# Altium PCB PCB_Tesis_v2_2024-11-08.pcbdoc
Units mil, origin at the board's own origin, x right, y up, seen from the top; angles counter-clockwise.
Board outline 5240.37 x 6489.24 mil, 2 copper layers (Top Layer, Bottom Layer); 33 components, 25 nets, 118 pads, 14 vias.
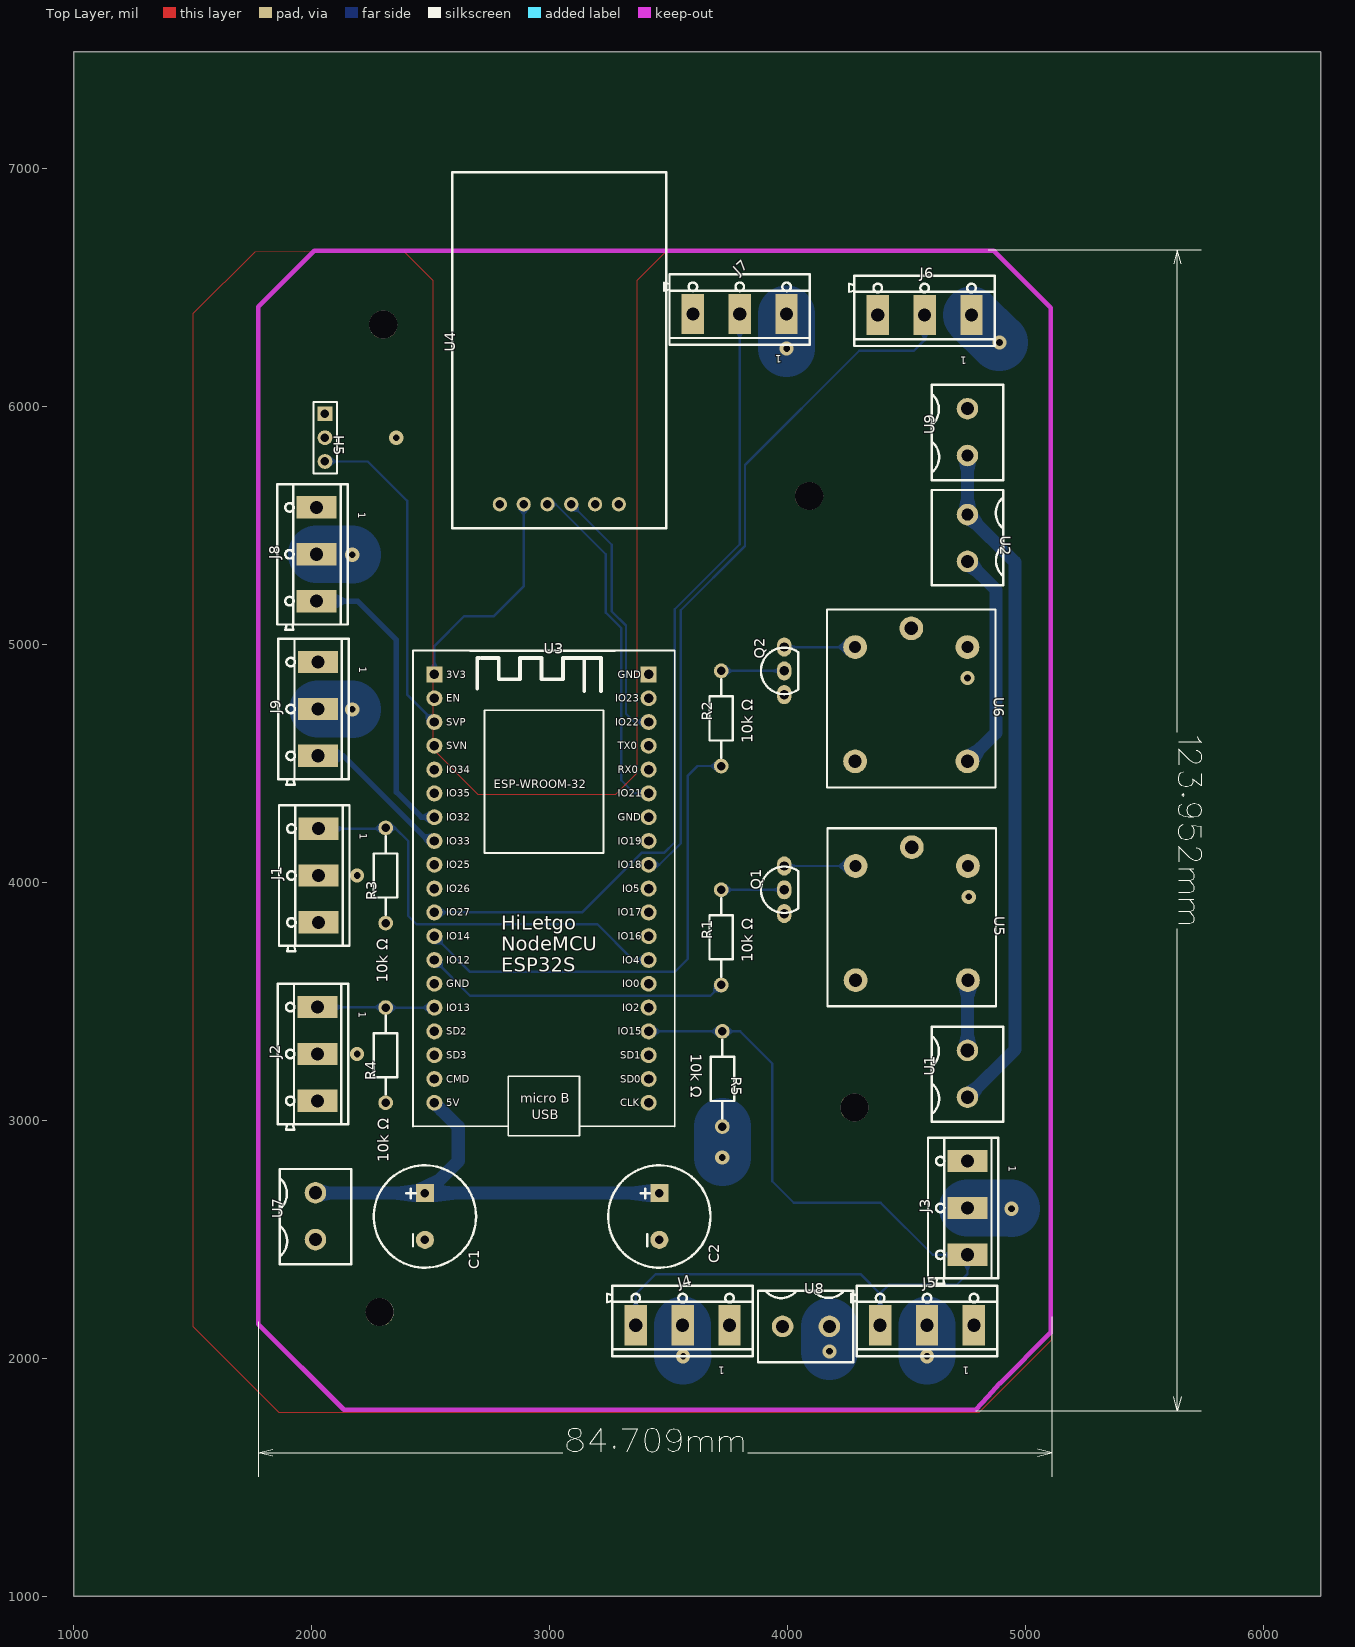
[diagram p0: Top Layer view]
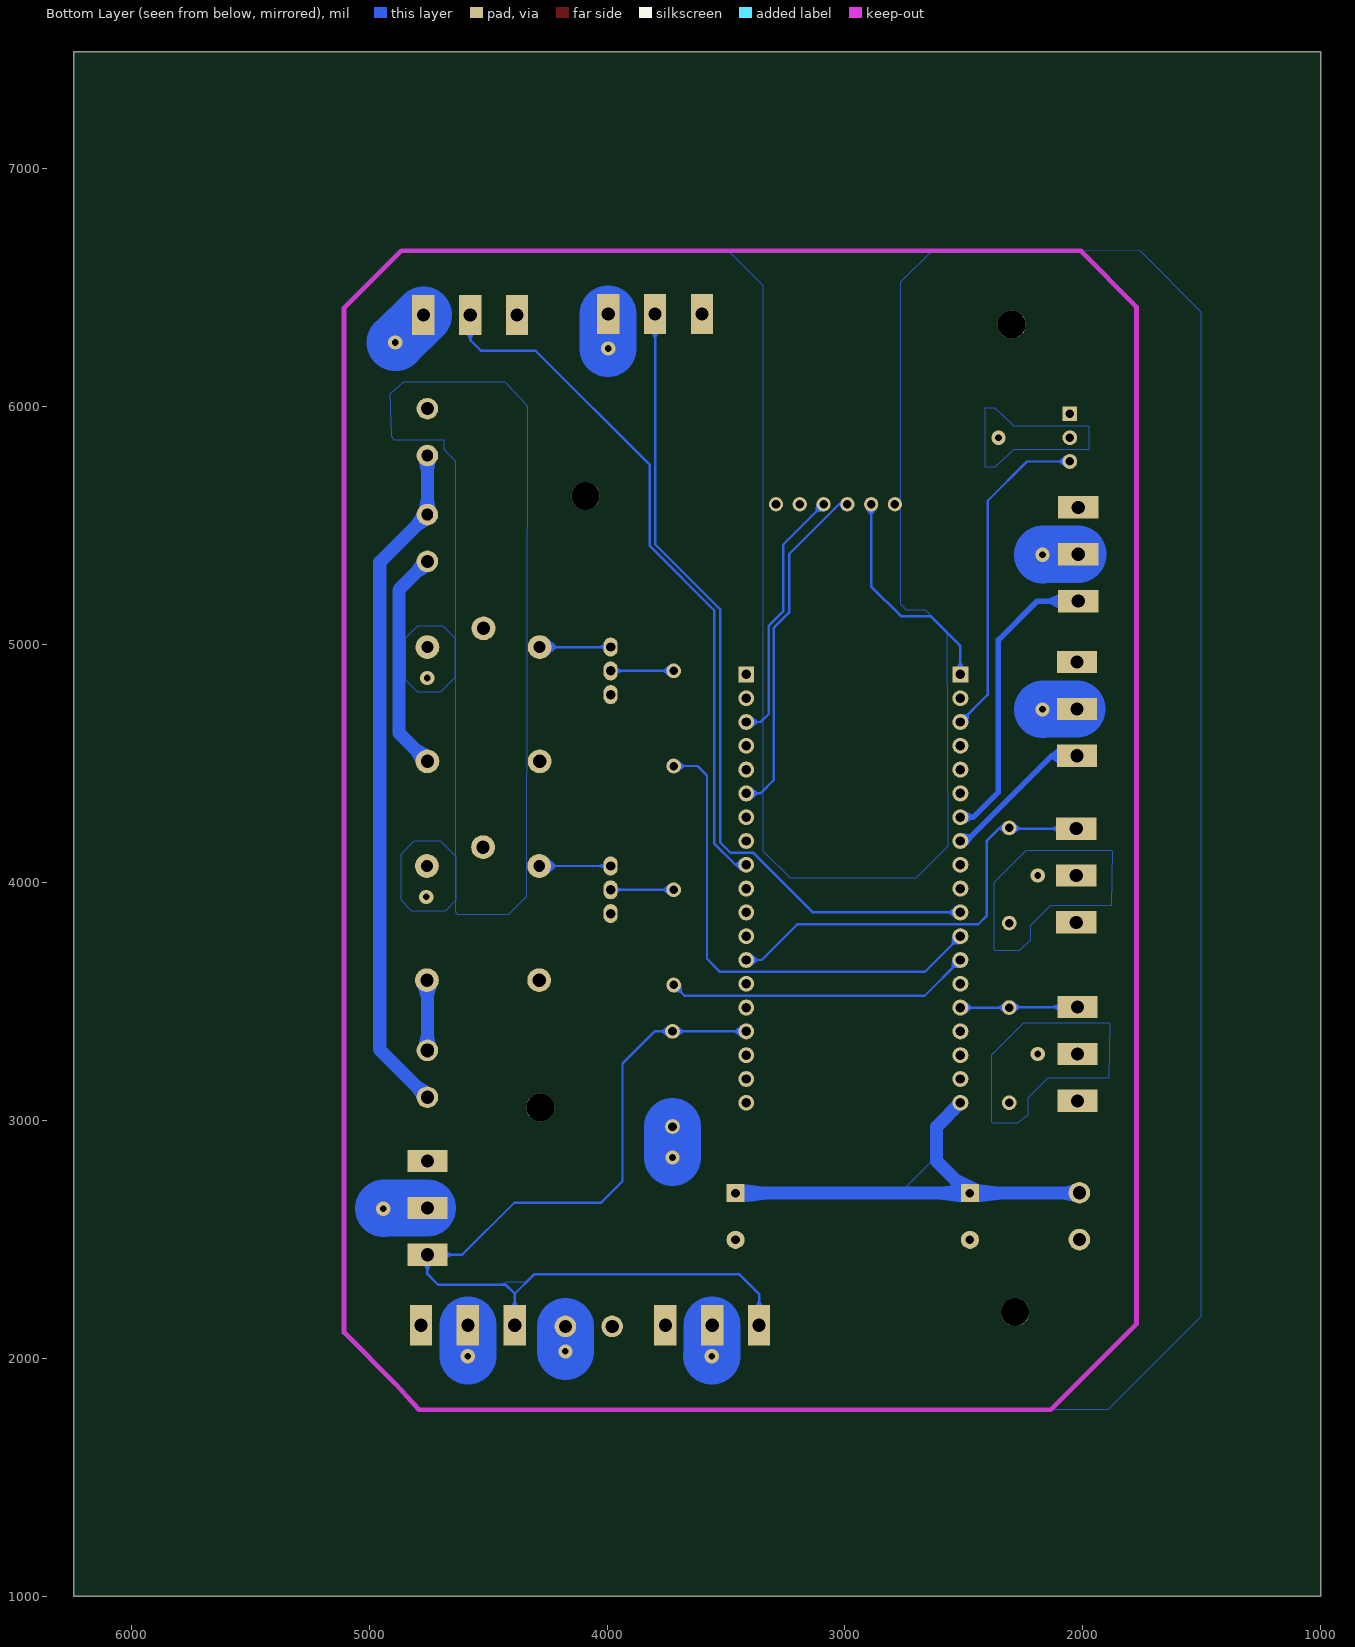
[diagram p1: Bottom Layer view, seen from below]

## Layer stack, top to bottom
Top Layer: signal copper (thickness not stored)
Dielectric: dielectric 12.6, FR-4, Dk 4.8
Bottom Layer: signal copper (thickness not stored)

## Board outline
6240.37,1000 1000,1000 1000,7489.24 6240.37,7489.24

## Components (designator, comment, footprint, x,y, rotation, side; value= is the part's Value field where it differs from the comment)
C1 "1000UF-25V(PTH)KIT" CPOL-RADIAL-1000UF-25V-KIT 2475,2595.18 r90 top
C2 "1000UF-25V(PTH)KIT" CPOL-RADIAL-1000UF-25V-KIT 3460,2595.18 r90 top
H5 "HDR-F-2.54_1x3" HDR-F-2.54_1X3 2055,5868.18 r270 top
J1 "CON_TERMINAL_BLOCK_03-5MM" TERMINAL_BLOCK_3P_5 2028,4028.19 r90 top
J2 "CON_TERMINAL_BLOCK_03-5MM" TERMINAL_BLOCK_3P_5 2023,3278.18 r90 top
J3 "CON_TERMINAL_BLOCK_03-5MM" TERMINAL_BLOCK_3P_5 4755,2631.18 r90 top
J4 "CON_TERMINAL_BLOCK_03-5MM" TERMINAL_BLOCK_3P_5 3558,2138.18 r0 top
J5 "CON_TERMINAL_BLOCK_03-5MM" TERMINAL_BLOCK_3P_5 4585,2138.18 r0 top
J6 "CON_TERMINAL_BLOCK_03-5MM" TERMINAL_BLOCK_3P_5 4575,6383.18 r0 top
J7 "CON_TERMINAL_BLOCK_03-5MM" TERMINAL_BLOCK_3P_5 3798,6388.18 r0 top
J8 "CON_TERMINAL_BLOCK_03-5MM" TERMINAL_BLOCK_3P_5 2020,5378.18 r90 top
J9 "CON_TERMINAL_BLOCK_03-5MM" TERMINAL_BLOCK_3P_5 2025,4728.18 r90 top
Q1 "2N2222A" "2N222A OH" 3985,3968.18 r90 top
Q2 "2N2222A" "2N222A OH" 3985,4888.18 r90 top
R1 "100Ω ±5%" "RESISTANCE 10K" 3720,3768.18 r90 top
R2 "100Ω ±5%" "RESISTANCE 10K" 3720,4688.18 r90 top
R3 "10KΩ ±5%" "RESISTANCE 10K" 2310,4028.18 r90 top
R4 "10KΩ ±5%" "RESISTANCE 10K" 2310,3273.18 r90 top
R5 "4.7KΩ ±5%" "RESISTANCE 10K" 3725,3173.19 r270 top
U1 "TERMINAL BLOCK 2P COPY" "BORNERA DOS TERMINALES TERMINAL BLOCK 5MM"#1 4755,3096.38 r90 top
U2 "TERMINAL BLOCK 2P COPY" "BORNERA DOS TERMINALES TERMINAL BLOCK 5MM"#2 4755,5544.98 r270 top
U3 "Nodemcu esp32 (HiLetgo)" HILETGO-NODEMCU-ESP32S 2975,3973.18 r0 top
U4 "DS3231" DS3231 2790,5588.18 r90 top
U5 "RELAY_RELAY-JZC" "SHORI S7 RELAY" 4521,4147.18 r270 top
U6 "RELAY_RELAY-JZC" "SHORI S7 RELAY" 4519,5067.18 r270 top
U7 "TERMINAL BLOCK 2P" "BORNERA DOS TERMINALES TERMINAL BLOCK 5MM"#3 2015,2498.18 r90 top
U8 "TERMINAL BLOCK 2P" "BORNERA DOS TERMINALES TERMINAL BLOCK 5MM"#3 3978.2,2133.18 r0 top
U9 "TERMINAL BLOCK 2P" "BORNERA DOS TERMINALES TERMINAL BLOCK 5MM"#2 4755,5793.18 r90 top
? "" ? 4521,3388.35 r0 top
? "" ? 4915.6,3823.19 r0 top
? "" ? 2965,2875.51 r0 top
? "" ? 5264.19,4218.18 r0 top
? "" ? 3442.5,1838.18 r0 top

## Footprints (in the part's own frame and the unit in brackets; to place one, negate y for a bottom-side part, rotate by r counter-clockwise, add the part's x,y. Pads: shape width x height; smd on the part's side, far side on the other; paste and mask are expansions set on the pad)
"2N222A OH" [mil]
  oval 80x60 hole 39.37: 1(100,0) 2(0,0) 3(-100,0)
  silkscreen extent -98,-59 98,98
"BORNERA DOS TERMINALES TERMINAL BLOCK 5MM"#1 [mm]
  round 2.3 hole 1.402 slot 1.472 at 0 deg: 1(4.999,0)
  round 2.3 hole 1.402: 2(0,0)
  silkscreen extent -2.62,-3.81 7.54,3.81
"BORNERA DOS TERMINALES TERMINAL BLOCK 5MM"#2 [mm]
  round 2.3 hole 1.402: 1(4.999,0)
  round 2.3 hole 1.2 slot 1.26 at 0 deg: 2(0,0)
  silkscreen extent -2.62,-3.81 7.54,3.81
"BORNERA DOS TERMINALES TERMINAL BLOCK 5MM"#3 [mm]
  round 2.3 hole 1.402: 1(4.999,0) 2(0,0)
  silkscreen extent -2.62,-3.81 7.54,3.81
CPOL-RADIAL-1000UF-25V-KIT [mil]
  rect 76x76 hole 35.98: +(98,0)
  round 76 hole 35.98: -(-98,0)
  silkscreen extent -215,-215 215,215
DS3231 [mil]
  round 60 hole 36: 1(0,0) 2(0,-100) 3(0,-200) 4(0,-300) 5(0,-400) 6(0,-500)
  silkscreen extent -100,-700 1396,200
HDR-F-2.54_1X3 [mil]
  rect 62x62 hole 35.98: 1(-100,0)
  round 62 hole 35.98: 2(0,0) 3(100,0)
  silkscreen extent -150,-49 150,50
HILETGO-NODEMCU-ESP32S [mm]
  rect 1.7x1.7 hole 1: 1(-11.684,22.86) 38(11.176,22.86)
  round 1.7 hole 1: 2(-11.684,20.32) 3(-11.684,17.78) 4(-11.684,15.24) 5(-11.684,12.7) 6(-11.684,10.16) 7(-11.684,7.62) 8(-11.684,5.08) 9(-11.684,2.54) 10(-11.684,0) 11(-11.684,-2.54) 12(-11.684,-5.08) 13(-11.684,-7.62) 14(-11.684,-10.16) 15(-11.684,-12.7) 16(-11.684,-15.24) 17(-11.684,-17.78) 18(-11.684,-20.32) 19(-11.684,-22.86) 20(11.176,-22.86) 21(11.176,-20.32) 22(11.176,-17.78) 23(11.176,-15.24) 24(11.176,-12.7) 25(11.176,-10.16) 26(11.176,-7.62) 27(11.176,-5.08) 28(11.176,-2.54) 29(11.176,0) 30(11.176,2.54) 31(11.176,5.08) 32(11.176,7.62) 33(11.176,10.16) 34(11.176,12.7) 35(11.176,15.24) 36(11.176,17.78) 37(11.176,20.32)
  silkscreen extent -13.97,-26.38 13.97,25.4
"RESISTANCE 10K" [mm]
  round 1.575 hole 0.914: 1(-5.08,0) 2(5.08,0)
  silkscreen extent -4.19,-1.25 4.19,1.25
"SHORI S7 RELAY" [mil]
  round 100 hole 50: 1(79,236) 2(79,-236)
  round 100 hole 55.2: 3(559,-236) 4(0,0) 14(559,236)
  silkscreen extent -79,-354 669,354
TERMINAL_BLOCK_3P_5 [mm]
  rect 2.38x4.285 hole 1.402: 1(5.004,0) 2(0,0) 3(-5.004,0)
  silkscreen extent -8.08,-3.3 7.49,4.22
? [mil]

## Free pads (board coordinates)
  round 118.11 hole 118.11 unplated: ""(2285,2193.18) ""(2300,6343.18) ""(4090,5623.18) ""(4280,3053.18)

## Via types
v1: diameter 60, hole 27.95, Top Layer to Bottom Layer, tented both sides, 14 vias

## Nets (pads, with @x,y where several pads share a name; then routed paths per layer and width w, separated by ;. In a path a pad name is that pad's centre, name@x,y a point inside that pad or via, vN(x,y) a via of type N, cw(c..) or ccw(c..) an arc to the next point about the centre after c; other vN are vias at no path point)
+3.3V: U3.1 U4.2 | length 943.6
  Bottom Layer w10: U3.1 2515,4993.18 2640,5118.18 2765,5118.18 2890,5243.18 U4.2
+5V: H5.2 J1.2 J2.2 J3.2 J4.2 J5.2 J6.1 J7.1 J8.2 J9.2 R3.1 R4.1 R5.2 U5.1 U6.1 U8.1 | length 1289.4
  Bottom Layer w239.76: J8.2 2168,5378.18 v1(2170,5376.18) ; J9.2 2168,4728.18 v1(2170,4726.18) ; J4.2 3558,2010.18 v1(3560,2008.18) ; v1(3725,2843.18) R5.2 ; v1(3995,6243.18) J7.1 ; v1(4175,2028.18) U8.1 ; v1(4585,2008.18) J5.2 ; J3.2 4937,2631.18 v1(4940,2628.18) ; J6.1 4887,6268.18 v1(4890,6268.18)
  other v1: 2190,3278.18 4760,3938.18 2190,4028.18 4755,4858.18 2355,5868.18
+5V_2: C1.+ C2.+ U3.19 U7.1 | length 1928.1
  Bottom Layer w55.12: U7.1 2016.8,2693.18 C1.+ ; U3.19 2615,2973.18 2615,2828.18 2480,2693.18 C1.+ ; C2.+ C1.+
DHTPIN: J1.1 R3.2 U3.26 | length 1802.7
  Bottom Layer w10: J1.1 2307,4225.18 R3.2 2350,4228.18 2405,4173.18 2405,3858.18 2440,3823.18 3200,3823.18 3350,3673.18 U3.26
DHTPIN2: J2.1 R4.2 U3.15 | length 492.8
  Bottom Layer w10: J2.1 2308,3475.18 R4.2 U3.15
FANPIN1: R1.1 U3.13 | length 1285.8
  Bottom Layer w10: U3.13 2665,3523.18 3675,3523.18 R1.1
FANPIN2: R2.1 U3.12 | length 2076.5
  Bottom Layer w10: U3.12 2665,3623.18 3525,3623.18 3580,3678.18 3580,4448.18 3620,4488.18 R2.1
GND: C1.- C2.- H5.1 J1.3 J2.3 J3.1 J4.1 J5.1 J6.3 J7.3 J8.1 J9.1 Q1.3 Q2.3 U3.38 U4.1 U7.2 U8.2
LINEA: U1.2 U2.2 U9.2 | length 2862.5
  Bottom Layer w55.12: U1.2 4955,3296.38 4955,5344.98 U2.2 U9.2
NEOPIXELPIN: J7.2 U3.11 | length 3465.3
  Bottom Layer w10: U3.11 3135,3873.18 3385,4123.18 3480,4123.18 3525,4168.18 3525,5147.18 3798,5420.18 J7.2
NEOPIXELPIN2: J6.2 U3.30 | length 2951.6
  Bottom Layer w10: U3.30 3460,4073.18 3550,4163.18 3550,5143.18 3820,5413.18 3820,5753.18 4300,6233.18 4530,6233.18 4575,6278.18 J6.2
ONE_WIRE_BUS: J3.3 J4.3 J5.3 R5.1 U3.23 | length 3993
  Bottom Layer w10: J4.3 3361,2269.18 3445,2353.18 4305,2353.18 4388,2270.18 J5.3 4388,2271.18 4425,2308.18 4710,2308.18 4755,2353.18 J3.3 4609,2434.18 4390,2653.18 4025,2653.18 3935,2743.18 3935,3238.18 3800,3373.18 R5.1 U3.23
PH_SENSOR: H5.3 U3.3 | length 1391
  Bottom Layer w10: H5.3 2235,5768.18 2400,5603.18 2400,4788.18 U3.3
Q1_1: Q1.1 U5.2 | length 300
  Bottom Layer w10: Q1.1 U5.2
Q1_2: Q1.2 R1.2 | length 265
  Bottom Layer w10: R1.2 Q1.2
Q2_1: Q2.1 U6.2 | length 298
  Bottom Layer w10: Q2.1 U6.2
Q2_2: Q2.2 R2.2 | length 265
  Bottom Layer w10: R2.2 Q2.2
RTC_SCL: U3.36 U4.4 | length 1084.8
  Bottom Layer w10: U4.4 3260,5418.18 3260,5138.18 3320,5078.18 3320,4708.18 3355,4673.18 U3.36
RTC_SDA: U3.33 U4.3 | length 1446.7
  Bottom Layer w10: U4.3 3025,5588.18 3235,5378.18 3235,5133.18 3300,5068.18 3300,4428.18 3355,4373.18 U3.33
S$13456: 
SERVO_PH_DOWN: J9.3 U3.8 | length 638.3
  Bottom Layer w23.23: J9.3 2132,4531.18 2490,4173.18 U3.8
SERVO_PH_UP: J8.3 U3.7 | length 1246
  Bottom Layer w23.23: J8.3 2192,5181.18 2355,5018.18 2355,4378.18 2460,4273.18 U3.7
VAC: U5.4 U6.4 U9.1
VENTILADOR1: U1.1 U5.14 | length 295.8
  Bottom Layer w55.12: U1.1 4755,3586.18 U5.14
VENTILADOR2: U2.1 U6.14 | length 939.4
  Bottom Layer w55.12: U6.14 4875,4628.18 4875,5228.18 U2.1
pads on no net: U3.2 U3.4 U3.5 U3.6 U3.9 U3.10 U3.14 U3.16 U3.17 U3.18 U3.20 U3.21 U3.22 U3.24 U3.25 U3.27 U3.28 U3.29 U3.31 U3.32 U3.34 U3.35 U3.37 U4.5 U4.6 U5.3 U6.3

## Polygon pours and split planes (outlines as drawn)
VAC on Bottom Layer (solid): 4895,5858.18 4905,5873.18 4910,6053.18 4855,6103.18 4430,6103.18 4335,6003.18 4340,3938.18 4415,3863.18 4625,3863.18 4635,3873.18 4635,5768.18 4685,5818.18 4685,5858.18
+5V on Bottom Layer (solid): 4690,5078.18 4640,5028.18 4640,4858.18 4700,4798.18 4795,4798.18 4845,4848.18 4845,5028.18 4795,5078.18 4760,5078.18
+5V on Bottom Layer (solid): 4710,4173.18 4700,4173.18 4635,4108.18 4635,3923.18 4680,3878.18 4820,3878.18 4865,3923.18 4865,4118.18 4810,4173.18
GND on Bottom Layer (solid): 1760,6653.18 1505,6398.18 1505,2173.18 1895,1783.18 4790,1783.18 5105,2098.18 5105,6408.18 4860,6653.18 3490,6653.18 3345,6508.18 3345,4133.18 3230,4018.18 2700,4018.18 2565,4153.18 2570,5053.18 2660,5143.18 2740,5143.18 2765,5168.18 2765,6523.18 2630,6658.18 2500,6658.18
+5V on Bottom Layer (solid): 1975,5918.18 1975,5818.18 2245,5818.18 2290,5818.18 2370,5743.18 2410,5743.18 2410,5993.18 2370,5993.18 2290,5918.18 2230,5918.18
+5V on Bottom Layer (solid): 1875,4128.18 1880,4133.18 2240,4133.18 2375,3998.18 2375,3718.18 2370,3713.18 2265,3713.18 2220,3758.18 2220,3818.18 2135,3903.18 1880,3903.18
+5V on Bottom Layer (solid): 1885,3403.18 1890,3408.18 2250,3408.18 2385,3273.18 2385,2993.18 2380,2988.18 2275,2988.18 2230,3023.18 2230,3093.18 2145,3178.18 1890,3178.18
+5V_2 on Bottom Layer (solid): 2640,2823.18 2755,2708.18 2535,2708.18 2530,2713.18
ONE_WIRE_BUS on Bottom Layer (solid): 4440,2313.18 4390,2273.18 4335,2318.18 4425,2318.18 4430,2313.18 4440,2313.18
+5V on Top Layer (solid): 1760,6648.18 1500,6388.18 1500,2133.18 1860,1773.18 4805,1773.18 5110,2078.18 5110,6413.18 4865,6658.18 3495,6658.18 3365,6528.18 3365,4458.18 3275,4368.18 2700,4368.18 2510,4558.18 2510,6528.18 2390,6648.18 2390,6653.18

## Other copper
Bottom Layer:
  region net PH_SENSOR: 2075.5,5744.93 2075.5,5791.43 2097.2,5773.18 2097.2,5763.18
  region net FANPIN1: 3689.06,3570.13 3721.94,3537.24 3693.69,3534.8 3686.62,3541.87
  region net Q1_2: 3740.51,3944.93 3740.51,3991.44 3762.21,3973.18 3762.21,3963.18
  region net FANPIN2: 3699.49,4464.93 3699.49,4511.44 3677.79,4493.18 3677.79,4483.18
  region net Q2_2: 3740.51,4864.93 3740.51,4911.44 3762.21,4893.18 3762.21,4883.18
  region net DHTPIN: 2291.2,4203.53 2287.89,4249.92 2267.54,4230.18 2268.25,4220.18
  region net DHTPIN: 2330.51,4204.93 2330.51,4251.44 2350,4233.18 2350,4223.18
  region net DHTPIN2: 2290.62,3497.38 2288.41,3450.93 2267.6,3470.18 2268.07,3480.18
  region net DHTPIN2: 2330.51,3449.93 2330.51,3496.44 2352.21,3478.18 2352.21,3468.18
  region net ONE_WIRE_BUS: 3745.51,3349.93 3745.51,3396.44 3767.21,3378.18 3767.21,3368.18
  region net ONE_WIRE_BUS: 3704.49,3349.93 3704.49,3396.44 3682.79,3378.18 3682.79,3368.18
  region net VENTILADOR1: 4788.96,3323.13 4721.04,3323.13 4727.44,3354.82 4782.56,3354.82
  region net LINEA: 4800.19,3093.55 4752.16,3141.57 4779.1,3159.46 4818.07,3120.48
  region net VENTILADOR2: 4800.19,5351.02 4752.16,5303 4779.1,5285.11 4818.07,5324.09
  region net LINEA: 4800.19,5547.82 4752.16,5499.8 4779.1,5481.91 4818.07,5520.88
  region net LINEA: 4788.96,5574.93 4721.04,5574.93 4727.44,5606.62 4782.56,5606.62
  region net RTC_SCL: 3392.87,4698.28 3392.86,4648.08 3369.44,4668.18 3369.44,4678.18
  region net RTC_SDA: 3392.87,4398.28 3392.86,4348.08 3369.44,4368.18 3369.44,4378.18
  region net NEOPIXELPIN2: 3437.14,4048.08 3437.13,4098.28 3460,4078.18 3460,4068.18
  region net DHTPIN: 3392.87,3698.28 3392.86,3648.08 3369.44,3668.18 3369.44,3678.18
  region net ONE_WIRE_BUS: 3437.14,3348.08 3437.13,3398.28 3460.56,3378.18 3460.56,3368.18
  region net PH_SENSOR: 2481.6,4671.08 2517.1,4706.57 2486.33,4708.93 2479.25,4701.86
  region net SERVO_PH_UP: 2492.87,4298.28 2492.86,4248.08 2469.44,4261.57 2469.44,4284.8
  region net SERVO_PH_DOWN: 2503.98,4204.77 2485.03,4158.29 2468.05,4178.7 2477.57,4202.04
  region net NEOPIXELPIN: 2537.14,3848.08 2537.13,3898.28 2560.56,3878.18 2560.56,3868.18
  region net FANPIN2: 2512.91,3739.78 2548.4,3775.27 2550.76,3744.5 2543.69,3737.43
  region net FANPIN1: 2512.91,3639.78 2548.4,3675.27 2550.76,3644.5 2543.69,3637.43
  region net DHTPIN2: 2492.87,3498.28 2492.86,3448.08 2469.44,3468.18 2469.44,3478.18
  region net +5V_2: 2512.91,3039.78 2548.4,3075.27 2566.7,3060.45 2527.74,3021.47
  region net +3.3V: 2912.5,5568.34 2867.5,5568.34 2885,5547.34 2895,5547.34
  region net RTC_SDA: 3009.84,5565.68 3009.84,5610.68 3025,5593.18 3025,5583.18
  region net RTC_SCL: 3088.12,5558.24 3119.94,5590.06 3122.42,5562.84 3115.34,5555.77
  region net Q1_1: 4251.93,4030.68 4251.93,4105.68 4216.93,4073.18 4216.93,4063.18
  region net VENTILADOR1: 4793.51,3554.02 4718.55,3556.23 4727.44,3520.95 4782.56,3519.33
  region net Q2_1: 4249.93,4950.68 4249.93,5025.68 4214.93,4993.18 4214.93,4983.18
  region net VENTILADOR2: 4804.9,4505.05 4751.87,4558.09 4783.65,4575.81 4822.62,4536.83
  region net +5V_2: 2045.93,2728.05 2043.94,2660.17 2075.81,2665.62 2077.42,2720.74
  region net LINEA: 4788.96,5763.24 4721.04,5763.24 4727.44,5731.54 4782.56,5731.54
  region net +5V_2: 2513,2731.18 2513,2655.18 2595.68,2665.62 2595.68,2720.74
  region net +5V_2: 2437,2655.18 2437,2731.18 2354.32,2720.74 2354.32,2665.62
  region net +5V_2: 2437,2731.18 2513,2655.18 2555.45,2729.66 2516.47,2768.63
  region net +5V_2: 3422,2655.18 3422,2731.18 3339.32,2720.74 3339.32,2665.62
  region net DHTPIN: 2112.35,4237.68 2112.35,4212.68 2127.35,4220.18 2127.35,4230.18
  region net DHTPIN2: 2107.35,3487.68 2107.35,3462.68 2122.35,3470.18 2122.35,3480.18
  region net ONE_WIRE_BUS: 4767.5,2387.33 4742.5,2387.33 4750,2372.33 4760,2372.33
  region net ONE_WIRE_BUS: 4670.65,2421.68 4670.65,2446.68 4655.65,2439.18 4655.65,2429.18
  region net ONE_WIRE_BUS: 3348.5,2222.53 3373.5,2222.53 3366,2237.53 3356,2237.53
  region net ONE_WIRE_BUS: 4375.5,2222.53 4400.5,2222.53 4393,2237.53 4383,2237.53
  region net ONE_WIRE_BUS: 4375.5,2222.53 4400.5,2222.53 4393,2237.53 4383,2237.53
  region net NEOPIXELPIN2: 4587.5,6298.83 4562.5,6298.83 4570,6283.83 4580,6283.83
  region net NEOPIXELPIN: 3810.5,6303.83 3785.5,6303.83 3793,6288.83 3803,6288.83
  region net SERVO_PH_UP: 2104.35,5210.22 2104.35,5152.15 2139.19,5169.57 2139.19,5192.8
  region net SERVO_PH_DOWN: 2109.35,4560.22 2109.35,4502.15 2132,4519.57 2132,4542.8
  region net +3.3V: 2502.5,4906.64 2527.5,4906.64 2520,4921.64 2510,4921.64
  region net Q1_1: 4015,4078.18 4015,4058.18 4030,4063.18 4030,4073.18
  region net Q1_2: 3955,3958.18 3955,3978.18 3940,3973.18 3940,3963.18
  region net Q2_1: 4015,4998.18 4015,4978.18 4030,4983.18 4030,4993.18
  region net Q2_2: 3955,4878.18 3955,4898.18 3940,4893.18 3940,4883.18

## Text inside footprints (layer, text, board x,y; h text height)
J1: Top Overlay "1" at 2202,4205.18 h30 r270
J2: Top Overlay "1" at 2197,3455.18 h30 r270
J3: Top Overlay "1" at 4929,2808.18 h30 r270
J4: Top Overlay "1" at 3735,1964.18 h30 r180
J5: Top Overlay "1" at 4762,1964.18 h30 r180
J6: Top Overlay "1" at 4752,6209.18 h30 r180
J7: Top Overlay "1" at 3975,6214.18 h30 r180
J8: Top Overlay "1" at 2194,5555.18 h30 r270
J9: Top Overlay "1" at 2199,4905.18 h30 r270
R1: Top Overlay "10k Ω" at 3870,3663.18 h80 r90
R2: Top Overlay "10k Ω" at 3870,4583.18 h80 r90
R3: Top Overlay "10k Ω" at 2335,3578.18 h80 r90
R4: Top Overlay "10k Ω" at 2340,2823.18 h80 r90
R5: Top Overlay "10k Ω" at 3575,3278.18 h80 r270
U3: Top Overlay "SD2" at 2565,3358.17 h30; Top Overlay "USB" at 2925,3003.5 h39.37; Top Overlay "micro B" at 2875,3073.5 h39.37; Top Overlay "ESP-WROOM-32" at 2765,4395.47 h35.43; Top Overlay "IO13" at 2565,3458.17 h30; Top Overlay "GND" at 2565,3558.17 h30; Top Overlay "IO12" at 2565,3658.17 h30; Top Overlay "IO14" at 2565,3758.17 h30; Top Overlay "IO27" at 2565,3858.17 h30; Top Overlay "IO26" at 2565,3958.17 h30; Top Overlay "IO25" at 2565,4058.17 h30; Top Overlay "IO33" at 2565,4158.17 h30; Top Overlay "IO32" at 2565,4258.17 h30; Top Overlay "IO35" at 2565,4358.17 h30; Top Overlay "IO34" at 2565,4458.17 h30; Top Overlay "SVN" at 2565,4558.17 h30; Top Overlay "SVP" at 2565,4658.17 h30; Top Overlay "RX0" at 3285,4458.17 h30; Top Overlay "IO15" at 3285,3358.17 h30; Top Overlay "IO2" at 3305,3458.17 h30; Top Overlay "IO0" at 3305,3558.17 h30; Top Overlay "IO4" at 3305,3658.17 h30; Top Overlay "IO16" at 3285,3758.17 h30; Top Overlay "IO17" at 3285,3858.17 h30; Top Overlay "IO5" at 3305,3958.17 h30; Top Overlay "IO18" at 3285,4058.17 h30; Top Overlay "IO19" at 3285,4158.17 h30; Top Overlay "GND" at 3285,4258.17 h30; Top Overlay "IO21" at 3285,4358.17 h30; Top Overlay "TX0" at 3285,4558.17 h30; Top Overlay "IO22" at 3275,4658.17 h30; Top Overlay "IO23" at 3275,4758.17 h30; Top Overlay "EN" at 2565,4758.17 h30; Top Overlay "SD1" at 3295,3258.17 h30; Top Overlay "SD0" at 3295,3158.17 h30; Top Overlay "GND" at 3285,4858.17 h30; Top Overlay "3V3" at 2565,4858.17 h30; Top Overlay "SD3" at 2565,3258.17 h30; Top Overlay "CMD" at 2565,3158.17 h30; Top Overlay "HiLetgo / NodeMCU / ESP32S" at 2795,3623.66 h59.05; Top Overlay "CLK" at 3295,3058.17 h30; Top Overlay "5V" at 2565,3058.17 h30